# Allegro board Multiuart_power2_V1_0.brd
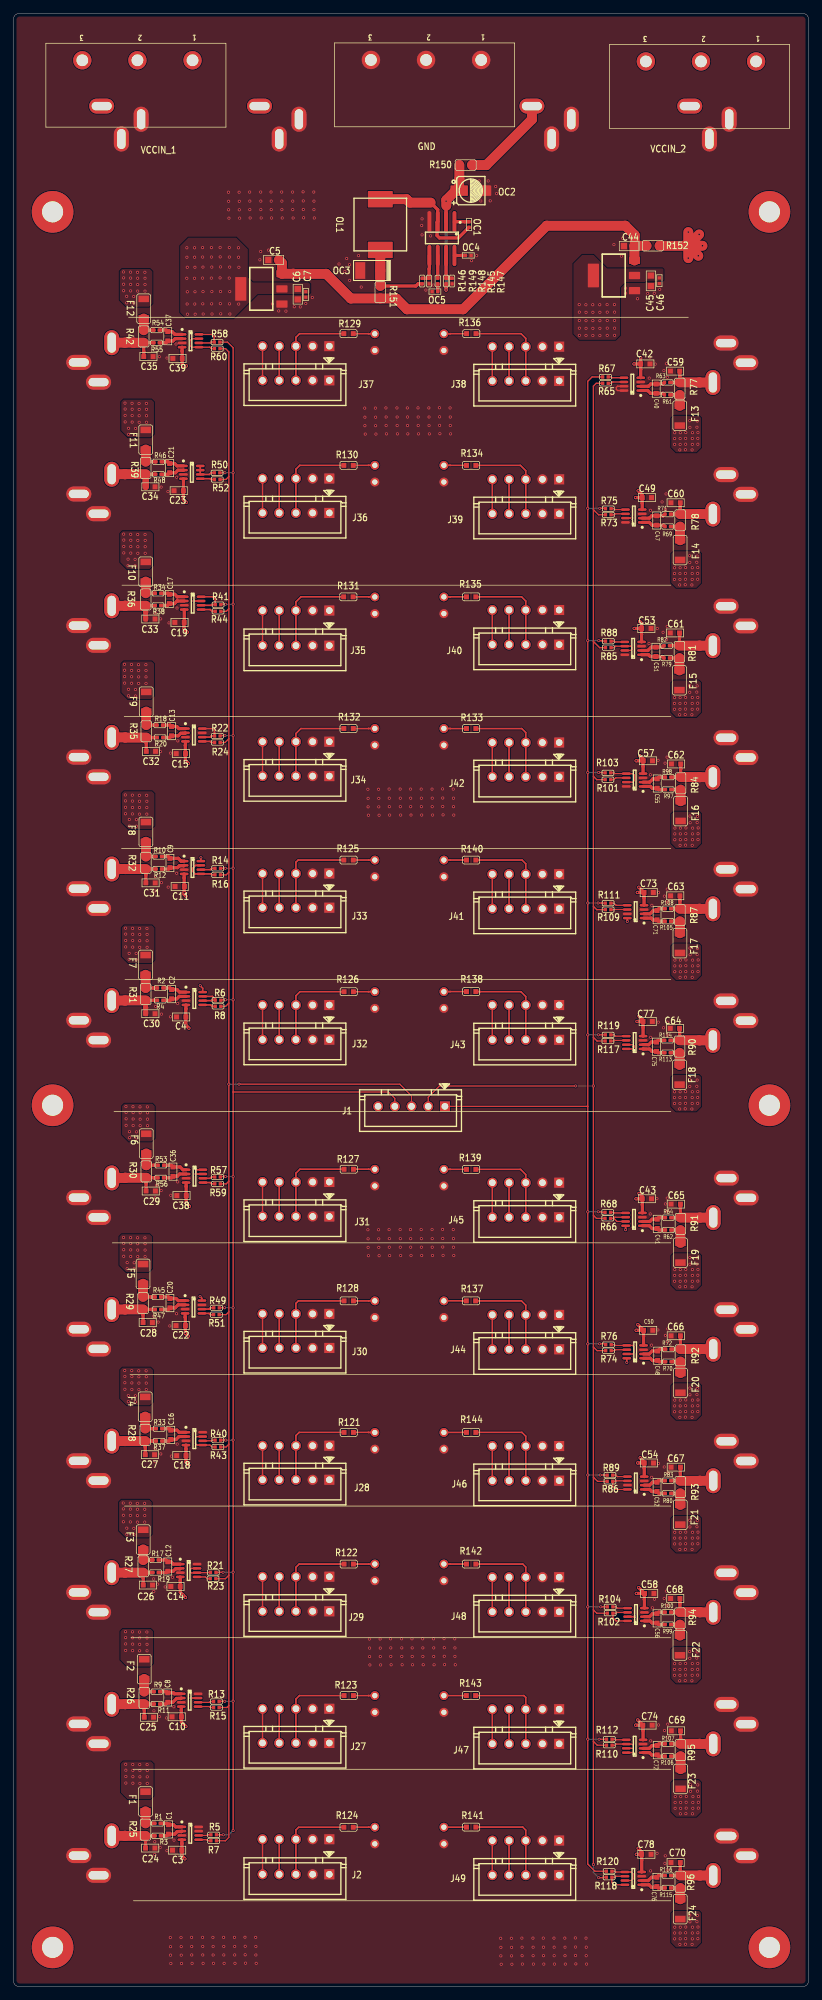
[diagram p0: board, top side]
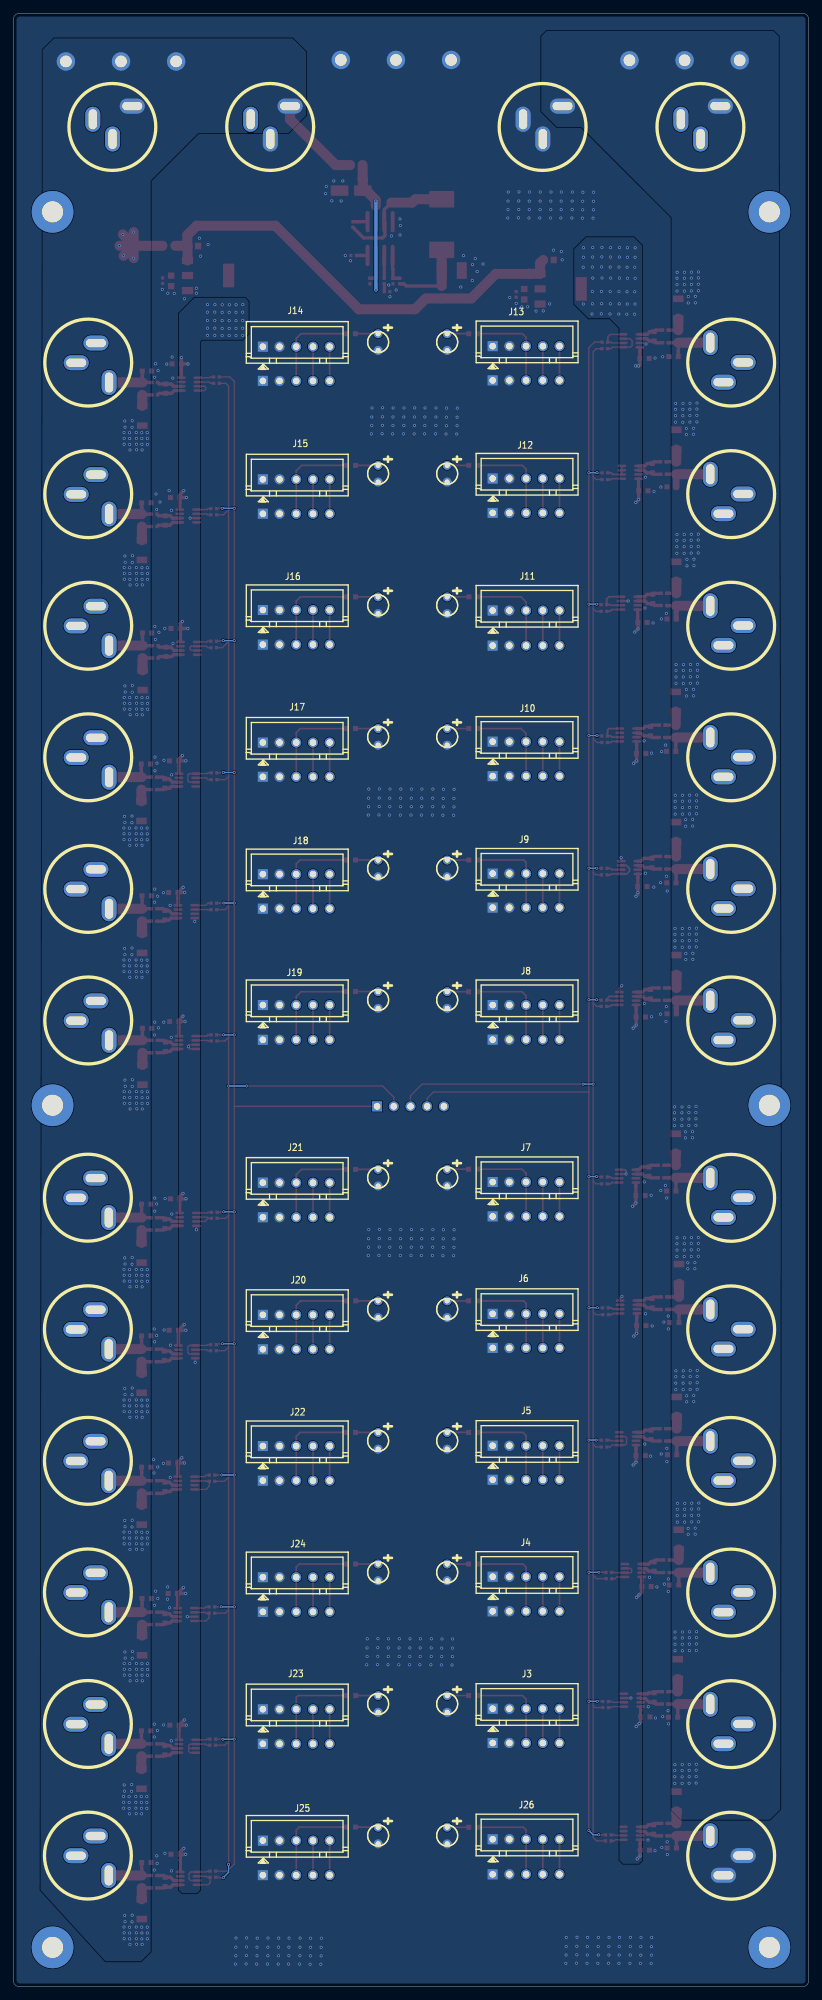
[diagram p1: board, bottom side, seen from below]

Outline 121 x 300 mm; copper layers: TOP, BOTTOM. Coordinates in mm from the lower left corner of the outline.
Outline path: 0,298.98 arc(0.3,299.7) 1.02,300 119.98,300 arc(120.7,299.7) 121,298.98 121,1.02 arc(120.7,0.3) 119.98,0 1.02,0 arc(0.3,0.3) 0,1.02 0,298.98

## Placement (name value [footprint] x y rotation side)
C1  1uF  [C0603]  23.61 23.93 90 top
C2  1uF  [C0603]  24.1 150.89 90 top
C3  1uF  [C0603]  24.94 20.78 180 top
C4  1uF  [C0603]  25.55 147.42 180 top
C5  10uF  [CC0603]  39.6 262.48 0 top
C6  10uF  [CC0603]  43.28 257.28 90 top
C7  104  [C0402]  44.5 257.25 270 top
C8  1uF  [C0603]  23.51 43.98 90 top
C9  1uF  [C0603]  23.84 170.83 90 top
C10  1uF  [C0603]  24.87 41.05 180 top
C11  1uF  [C0603]  25.32 167.26 180 top
C12  1uF  [C0603]  23.51 63.89 90 top
C13  1uF  [C0603]  24.07 190.87 90 top
C14  1uF  [C0603]  24.69 60.86 180 top
C15  1uF  [C0603]  25.5 187.45 180 top
C16  1uF  [C0603]  23.97 83.91 90 top
C17  1uF  [C0603]  23.74 210.96 90 top
C18  1uF  [C0603]  25.58 80.75 180 top
C19  1uF  [C0603]  25.3 207.39 180 top
C20  1uF  [C0603]  23.84 103.92 90 top
C21  1uF  [C0603]  23.79 230.85 90 top
C22  1uF  [C0603]  25.48 100.51 180 top
C23  1uF  [C0603]  25.17 227.41 180 top
C24  10uF  [C0603]  20.85 21.09 0 top
C25  10uF  [C0603]  20.64 40.98 0 top
C26  10uF  [C0603]  20.49 61.07 0 top
C27  10uF  [C0603]  20.8 80.88 180 top
C28  10uF  [C0603]  20.46 100.98 180 top
C29  10uF  [C0603]  20.92 120.97 180 top
C30  10uF  [C0603]  20.87 147.91 180 top
C31  10uF  [C0603]  20.9 167.8 180 top
C32  10uF  [C0603]  20.95 187.79 180 top
C33  10uF  [C0603]  20.87 207.91 180 top
C34  10uF  [C0603]  20.87 228 180 top
C35  10uF  [C0603]  20.57 247.8 180 top
C36  1uF  [C0603]  24.3 123.91 90 top
C37  1uF  [C0603]  23.51 250.89 90 top
C38  1uF  [C0603]  25.6 120.27 180 top
C39  1uF  [C0603]  24.99 247.52 180 top
C40  1uF  [C0603]  97.79 242.93 270 top
C41  1uF  [C0603]  97.94 115.98 270 top
C42  1uF  [C0603]  96.14 246.68 0 top
C43  1uF  [C0603]  96.37 119.79 0 top
C44  10uF  [CC0603]  93.68 264.59 0 top
C45  10uF  [CC0603]  96.98 259.31 90 top
C46  104  [C0402]  98.27 259.33 270 top
C47  1uF  [C0603]  97.87 222.88 270 top
C48  1uF  [C0603]  98.02 95.94 270 top
C49  1uF  [C0603]  96.37 226.36 0 top
C50  1uF  [C0603]  96.57 99.8 0 top
C51  1uF  [C0603]  97.74 202.92 270 top
C52  1uF  [C0603]  97.92 76 270 top
C53  1uF  [C0603]  96.29 206.48 0 top
C54  1uF  [C0603]  96.67 79.63 0 top
C55  1uF  [C0603]  97.94 182.91 270 top
C56  1uF  [C0603]  97.92 56.01 270 top
C57  1uF  [C0603]  96.52 186.36 0 top
C58  1uF  [C0603]  96.72 59.79 0 top
C59  10uF  [C0603]  100.66 245.59 0 top
C60  10uF  [C0603]  100.74 225.58 0 top
C61  10uF  [C0603]  100.63 205.79 0 top
C62  10uF  [C0603]  100.81 185.88 0 top
C63  10uF  [C0603]  100.69 165.84 0 top
C64  10uF  [C0603]  100.63 145.69 0 top
C65  10uF  [C0603]  100.76 118.97 0 top
C66  10uF  [C0603]  100.76 98.96 0 top
C67  10uF  [C0603]  100.76 78.99 0 top
C68  10uF  [C0603]  100.69 59.03 0 top
C69  10uF  [C0603]  100.79 38.91 0 top
C70  10uF  [C0603]  100.74 18.9 0 top
C71  1uF  [C0603]  97.92 162.89 270 top
C72  1uF  [C0603]  97.94 35.97 270 top
C73  1uF  [C0603]  96.65 166.34 0 top
C74  1uF  [C0603]  96.47 39.78 0 top
C75  1uF  [C0603]  97.84 142.9 270 top
C76  1uF  [C0603]  97.89 15.95 270 top
C77  1uF  [C0603]  96.49 146.74 0 top
C78  1uF  [C0603]  96.29 20.14 0 top
D13  LED  [LED_S]  55 83 270 bottom
D14  LED  [LED_S]  55 63 270 bottom
D15  LED  [LED_S]  55 43 270 bottom
D16  LED  [LED_S]  55 23 270 bottom
D17  LED  [LED_S]  55 170 270 bottom
D18  LED  [LED_S]  55 150 270 bottom
D19  LED  [LED_S]  55 123 270 bottom
D20  LED  [LED_S]  55 103 270 bottom
D21  LED  [LED_S]  55 250 270 bottom
D22  LED  [LED_S]  55 230 270 bottom
D23  LED  [LED_S]  55 210 270 bottom
D24  LED  [LED_S]  55 190 270 bottom
D25  LED  [LED_S]  65.5 190 270 bottom
D26  LED  [LED_S]  65.5 210 270 bottom
D27  LED  [LED_S]  65.5 230 270 bottom
D28  LED  [LED_S]  65.5 250 270 bottom
D29  LED  [LED_S]  65.5 103 270 bottom
D30  LED  [LED_S]  65.5 123 270 bottom
D31  LED  [LED_S]  65.5 150 270 bottom
D32  LED  [LED_S]  65.5 170 270 bottom
D33  LED  [LED_S]  65.5 23 270 bottom
D34  LED  [LED_S]  65.5 43 270 bottom
D35  LED  [LED_S]  65.5 63 270 bottom
D36  LED  [LED_S]  65.5 83 270 bottom
F1  3A  [R1206]  20.13 28.17 270 top
F2  3A  [R1206]  19.93 48.3 270 top
F3  3A  [R1206]  19.78 67.98 270 top
F4  3A  [R1206]  20.08 88.17 270 top
F5  3A  [R1206]  19.75 108.37 270 top
F6  3A  [R1206]  20.24 128.17 270 top
F7  3A  [R1206]  20.13 155.33 270 top
F8  3A  [R1206]  20.19 175.55 270 top
F9  3A  [R1206]  20.24 195.34 270 top
F10  3A  [R1206]  20.16 215.1 270 top
F11  3A  [R1206]  20.16 235.16 270 top
F12  3A  [R1206]  19.86 255.08 270 top
F13  3A  [R1206]  101.37 238.81 90 top
F14  3A  [R1206]  101.42 218.39 90 top
F15  3A  [R1206]  101.32 198.6 90 top
F16  3A  [R1206]  101.5 178.71 90 top
F17  3A  [R1206]  101.4 158.65 90 top
F18  3A  [R1206]  101.35 138.63 90 top
F19  3A  [R1206]  101.47 111.58 90 top
F20  3A  [R1206]  101.47 91.8 90 top
F21  3A  [R1206]  101.45 71.75 90 top
F22  3A  [R1206]  101.4 51.89 90 top
F23  3A  [R1206]  101.5 31.6 90 top
F24  3A  [R1206]  101.45 11.81 90 top
J1  -  [CON5]  55.5 133.83 0 top
J2  -  [CON5]  37.92 17.1 0 top
J3  -  [CON5]  37.92 42.27 0 bottom
J4  -  [CON5]  37.92 62.34 0 bottom
J5  -  [CON5]  37.92 82.25 0 bottom
J6  -  [CON5]  37.92 102.29 0 bottom
J7  -  [CON5]  37.92 122.33 0 bottom
J8  -  [CON5]  37.92 149.23 0 bottom
J9  -  [CON5]  37.92 169.22 0 bottom
J10  -  [CON5]  37.92 189.26 0 bottom
J11  -  [CON5]  37.92 209.2 0 bottom
J12  -  [CON5]  37.92 229.27 0 bottom
J13  -  [CON5]  37.92 249.38 0 bottom
J14  -  [CON5]  72.87 249.31 0 bottom
J15  -  [CON5]  72.87 229.14 0 bottom
J16  -  [CON5]  72.87 209.28 0 bottom
J17  -  [CON5]  72.87 189.14 0 bottom
J18  -  [CON5]  72.87 169.12 0 bottom
J19  -  [CON5]  72.87 149.23 0 bottom
J20  -  [CON5]  72.87 102.14 0 bottom
J21  -  [CON5]  72.87 122.23 0 bottom
J22  -  [CON5]  72.87 82.2 0 bottom
J23  -  [CON5]  72.87 42.2 0 bottom
J24  -  [CON5]  72.87 62.26 0 bottom
J25  -  [CON5]  72.87 22.23 0 bottom
J26  -  [CON5]  37.92 22.44 0 bottom
J27  -  [CON5]  37.92 37.07 0 top
J28  -  [CON5]  37.92 77.07 0 top
J29  -  [CON5]  37.92 57.08 0 top
J30  -  [CON5]  37.92 97.11 0 top
J31  -  [CON5]  37.92 117.1 0 top
J32  -  [CON5]  37.92 143.97 0 top
J33  -  [CON5]  37.92 164.04 0 top
J34  -  [CON5]  37.92 184.03 0 top
J35  -  [CON5]  37.92 203.87 0 top
J36  -  [CON5]  37.92 224.04 0 top
J37  -  [CON5]  37.92 244.18 0 top
J38  -  [CON5]  72.87 244.1 0 top
J39  -  [CON5]  72.87 223.91 0 top
J40  -  [CON5]  72.87 204.02 0 top
J41  -  [CON5]  72.87 163.89 0 top
J42  -  [CON5]  72.87 183.93 0 top
J43  -  [CON5]  72.87 143.95 0 top
J44  -  [CON5]  72.87 96.91 0 top
J45  -  [CON5]  72.87 116.97 0 top
J46  -  [CON5]  72.87 76.94 0 top
J47  -  [CON5]  72.87 36.94 0 top
J48  -  [CON5]  72.87 57 0 top
J49  -  [CON5]  72.87 16.97 0 top
NOREF  -  [unnamed]  6 134 0 top
NOREF#2  -  [unnamed]  115.01 6 0 top
NOREF#3  -  [unnamed]  115.01 269.8 0 top
NOREF#4  -  [unnamed]  115.01 134 0 top
NOREF#5  -  [unnamed]  6 269.8 0 top
NOREF#6  -  [unnamed]  6 6 0 top
OC1  10nF  [C0402]  69.32 267.87 270 top
OC2  22uF-25V  [CAPAE430X600]  69.6 273.02 0 top
OC3  22uF-16V  [CT1210]  54.31 260.88 180 top
OC4  104  [C0402]  69.22 263.17 0 top
OC5  332  [C0402]  64.14 257.68 180 top
OL1  22uH-DCR<0.1R-2A  [INDP8X8]  55.83 267.87 270 top
P1  ACIN  [DC_3]  8.71 19.96 180 bottom
P2  ACIN  [DC_3]  8.71 39.96 180 bottom
P3  ACIN  [DC_3]  8.71 59.96 180 bottom
P4  ACIN  [DC_3]  8.71 79.96 180 bottom
P5  ACIN  [DC_3]  8.71 99.96 180 bottom
P6  ACIN  [DC_3]  8.71 119.96 180 bottom
P7  ACIN  [DC_3]  8.71 146.92 180 bottom
P8  ACIN  [DC_3]  8.71 166.92 180 bottom
P9  ACIN  [DC_3]  8.71 186.92 180 bottom
P10  ACIN  [DC_3]  8.71 206.92 180 bottom
P11  ACIN  [DC_3]  8.71 226.92 180 bottom
P12  ACIN  [DC_3]  8.71 246.92 180 bottom
P13  ACIN  [DC_3]  16.46 279.61 270 bottom
P14  ACIN  [DC_3]  40.46 279.61 270 bottom
P15  ACIN  [DC_3]  112.68 246.86 0 bottom
P16  ACIN  [DC_3]  112.68 226.86 0 bottom
P17  ACIN  [DC_3]  112.68 206.86 0 bottom
P18  ACIN  [DC_3]  112.68 186.86 0 bottom
P19  ACIN  [DC_3]  112.68 166.86 0 bottom
P20  ACIN  [DC_3]  112.68 146.86 0 bottom
P21  ACIN  [DC_3]  112.73 119.93 0 bottom
P22  ACIN  [DC_3]  112.73 99.93 0 bottom
P23  ACIN  [DC_3]  112.73 79.93 0 bottom
P24  ACIN  [DC_3]  112.73 59.93 0 bottom
P25  ACIN  [DC_3]  112.73 39.93 0 bottom
P26  ACIN  [DC_3]  112.73 19.93 0 bottom
P27  ACIN  [DC_3]  105.89 279.61 270 bottom
P28  ACIN  [DC_3]  81.89 279.61 270 bottom
R1  10R  [R0402]  21.96 24.84 0 top
R2  10R  [R0402]  22.37 151.83 0 top
R3  10R  [R0402]  21.98 22.96 0 top
R4  10R  [R0402]  22.37 149.95 0 top
R5  0R  [R0402]  30.49 23.11 0 top
R6  0R  [R0402]  31.16 149.97 0 top
R7  0R  [R0402]  30.49 22.2 0 top
R8  0R  [R0402]  31.16 149.03 0 top
R9  10R  [R0402]  21.86 44.87 0 top
R10  10R  [R0402]  22.14 171.82 0 top
R11  10R  [R0402]  21.86 42.99 0 top
R12  10R  [R0402]  22.14 169.91 0 top
R13  0R  [R0402]  30.9 43.37 0 top
R14  0R  [R0402]  31.11 170.01 0 top
R15  0R  [R0402]  30.9 42.45 0 top
R16  0R  [R0402]  31.11 169.02 0 top
R17  10R  [R0402]  21.66 64.88 0 top
R18  10R  [R0402]  22.29 191.78 0 top
R19  10R  [R0402]  21.66 62.98 0 top
R20  10R  [R0402]  22.34 189.9 0 top
R21  0R  [R0402]  30.43 62.99 0 top
R22  0R  [R0402]  31.06 190.13 0 top
R23  0R  [R0402]  30.4 62.04 0 top
R24  0R  [R0402]  31.06 189.14 0 top
R25  0R01  [R0805]  20.13 23.9 270 top
R26  0R01  [R0805]  19.93 43.93 270 top
R27  0R01  [R0805]  19.78 63.92 270 top
R28  0R01  [R0805]  20.08 83.91 270 top
R29  0R01  [R0805]  19.75 103.92 270 top
R30  0R01  [R0805]  20.24 123.94 270 top
R31  0R01  [R0805]  20.16 150.89 270 top
R32  0R01  [R0805]  20.19 170.85 270 top
R33  10R  [R0402]  22.19 84.85 0 top
R34  10R  [R0402]  22.04 211.82 0 top
R35  0R01  [R0805]  20.24 190.84 270 top
R36  0R01  [R0805]  20.16 210.88 270 top
R37  10R  [R0402]  22.19 82.97 0 top
R38  10R  [R0402]  22.04 209.97 0 top
R39  0R01  [R0805]  20.16 230.87 270 top
R40  0R  [R0402]  31.13 83.09 0 top
R41  0R  [R0402]  31.16 210.09 0 top
R42  0R01  [R0805]  19.86 250.86 270 top
R43  0R  [R0402]  31.13 82.05 0 top
R44  0R  [R0402]  31.16 209.08 0 top
R45  10R  [R0402]  22.01 104.86 0 top
R46  10R  [R0402]  22.12 231.81 0 top
R47  10R  [R0402]  22.04 102.96 0 top
R48  10R  [R0402]  22.09 229.91 0 top
R49  0R  [R0402]  30.93 103.21 0 top
R50  0R  [R0402]  31.01 230.13 0 top
R51  0R  [R0402]  30.9 102.17 0 top
R52  0R  [R0402]  31.03 229.12 0 top
R53  10R  [R0402]  22.47 124.88 0 top
R54  10R  [R0402]  21.81 251.83 0 top
R55  10R  [R0402]  21.81 249.9 0 top
R56  10R  [R0402]  22.45 122.97 0 top
R57  0R  [R0402]  31.08 123.1 0 top
R58  0R  [R0402]  31.01 250 0 top
R59  0R  [R0402]  31.08 122.06 0 top
R60  0R  [R0402]  31.03 249.01 0 top
R61  10R  [R0402]  99.47 241.99 180 top
R62  10R  [R0402]  99.62 115.04 180 top
R63  10R  [R0402]  99.47 243.87 180 top
R64  10R  [R0402]  99.62 116.92 180 top
R65  0R  [R0402]  90.07 243.74 180 top
R66  0R  [R0402]  90.42 116.81 180 top
R67  0R  [R0402]  90.07 244.7 180 top
R68  0R  [R0402]  90.42 117.73 180 top
R69  10R  [R0402]  99.54 221.97 180 top
R70  10R  [R0402]  99.64 95.02 180 top
R71  10R  [R0402]  99.54 223.85 180 top
R72  10R  [R0402]  99.64 96.93 180 top
R73  0R  [R0402]  90.5 223.75 180 top
R74  0R  [R0402]  90.53 96.7 180 top
R75  0R  [R0402]  90.5 224.69 180 top
R76  0R  [R0402]  90.53 97.61 180 top
R77  0R01  [R0805]  101.37 242.93 90 top
R78  0R01  [R0805]  101.42 222.91 90 top
R79  10R  [R0402]  99.39 201.98 180 top
R80  10R  [R0402]  99.59 75.01 180 top
R81  0R01  [R0805]  101.32 202.92 90 top
R82  10R  [R0402]  99.39 203.86 180 top
R83  10R  [R0402]  99.59 76.94 180 top
R84  0R01  [R0805]  101.5 182.93 90 top
R85  0R  [R0402]  90.5 203.56 180 top
R86  0R  [R0402]  90.75 76.83 180 top
R87  0R01  [R0805]  101.4 162.92 90 top
R88  0R  [R0402]  90.5 204.55 180 top
R89  0R  [R0402]  90.75 77.77 180 top
R90  0R01  [R0805]  101.35 142.93 90 top
R91  0R01  [R0805]  101.47 115.98 90 top
R92  0R01  [R0805]  101.47 95.99 90 top
R93  0R01  [R0805]  101.45 75.97 90 top
R94  0R01  [R0805]  101.4 56.01 90 top
R95  0R01  [R0805]  101.47 35.99 90 top
R96  0R01  [R0805]  101.45 15.98 90 top
R97  10R  [R0402]  99.62 181.99 180 top
R98  10R  [R0402]  99.62 183.87 180 top
R99  10R  [R0402]  99.57 55.07 180 top
R100  10R  [R0402]  99.57 56.95 180 top
R101  0R  [R0402]  90.45 183.49 180 top
R102  0R  [R0402]  90.78 56.79 180 top
R103  0R  [R0402]  90.45 184.53 180 top
R104  0R  [R0402]  90.78 57.76 180 top
R105  10R  [R0402]  99.57 161.98 180 top
R106  10R  [R0402]  99.59 35.05 180 top
R107  10R  [R0402]  99.59 36.93 180 top
R108  10R  [R0402]  99.57 163.88 180 top
R109  0R  [R0402]  90.47 163.73 180 top
R110  0R  [R0402]  90.65 36.73 180 top
R111  0R  [R0402]  90.47 164.72 180 top
R112  0R  [R0402]  90.65 37.64 180 top
R113  10R  [R0402]  99.52 141.99 180 top
R114  10R  [R0402]  99.49 143.87 180 top
R115  10R  [R0402]  99.57 15.04 180 top
R116  10R  [R0402]  99.57 16.92 180 top
R117  0R  [R0402]  90.45 143.76 180 top
R118  0R  [R0402]  90.63 16.66 180 top
R119  0R  [R0402]  90.47 144.7 180 top
R120  0R  [R0402]  90.63 17.58 180 top
R121  102  [R0603]  51.03 84.28 0 top
R122  102  [R0603]  51.03 64.26 0 top
R123  102  [R0603]  51.03 44.27 0 top
R124  102  [R0603]  51 24.26 0 top
R125  102  [R0603]  51 171.27 0 top
R126  102  [R0603]  51.03 151.26 0 top
R127  102  [R0603]  51.03 124.28 0 top
R128  102  [R0603]  51.03 104.27 0 top
R129  102  [R0603]  51 251.28 0 top
R130  102  [R0603]  51 231.27 0 top
R131  102  [R0603]  50.98 211.28 0 top
R132  102  [R0603]  51 191.26 0 top
R133  102  [R0603]  69.65 191.26 180 top
R134  102  [R0603]  69.65 231.27 180 top
R135  102  [R0603]  69.65 211.28 180 top
R136  102  [R0603]  69.67 251.28 180 top
R137  102  [R0603]  69.62 104.27 180 top
R138  102  [R0603]  69.65 151.28 180 top
R139  102  [R0603]  69.65 124.26 180 top
R140  102  [R0603]  69.65 171.27 180 top
R141  102  [R0603]  69.65 24.28 180 top
R142  102  [R0603]  69.65 64.26 180 top
R143  102  [R0603]  69.62 44.27 180 top
R144  102  [R0603]  69.65 84.28 180 top
R145  1M  [R0402]  65.84 259.28 90 top
R146  47K  [R0402]  62.2 259.28 270 top
R147  1M  [R0402]  66.75 259.28 90 top
R148  2K2  [R0402]  64.57 259.28 90 top
R149  10K  [R0402]  63.25 259.28 90 top
R150  0R  [R0805]  68.81 276.91 180 top
R151  0R  [R0805]  55.83 257.58 270 top
R152  0R/NC  [R0805]  97.28 264.64 180 top
U1  INA219BIDCNT  [SOP8P0_65B1_65X3_00H1_45]  26.93 23.34 270 top
U2  INA219BIDCNT  [SOP8P0_65B1_65X3_00H1_45]  27.55 150.23 270 top
U3  AMS1117-3.3V  [SOT223]  37.72 258.09 90 top
U4  INA219BIDCNT  [SOP8P0_65B1_65X3_00H1_45]  26.84 43.57 270 top
U5  INA219BIDCNT  [SOP8P0_65B1_65X3_00H1_45]  27.27 170.14 270 top
U6  INA219BIDCNT  [SOP8P0_65B1_65X3_00H1_45]  26.69 63.28 270 top
U7  INA219BIDCNT  [SOP8P0_65B1_65X3_00H1_45]  27.48 190.28 270 top
U8  INA219BIDCNT  [SOP8P0_65B1_65X3_00H1_45]  27.3 210.32 270 top
U9  INA219BIDCNT  [SOP8P0_65B1_65X3_00H1_45]  27.55 83.32 270 top
U10  INA219BIDCNT  [SOP8P0_65B1_65X3_00H1_45]  27.42 103.34 270 top
U11  INA219BIDCNT  [SOP8P0_65B1_65X3_00H1_45]  27.17 230.21 270 top
U12  INA219BIDCNT  [SOP8P0_65B1_65X3_00H1_45]  27.58 123.23 270 top
U13  INA219BIDCNT  [SOP8P0_65B1_65X3_00H1_45]  26.97 250.2 270 top
U14  INA219BIDCNT  [SOP8P0_65B1_65X3_00H1_45]  94.16 243.61 90 top
U15  INA219BIDCNT  [SOP8P0_65B1_65X3_00H1_45]  94.41 116.66 90 top
U16  AMS1117-3.3V  [SOT223]  91.34 260.12 90 top
U17  INA219BIDCNT  [SOP8P0_65B1_65X3_00H1_45]  94.39 223.57 90 top
U18  INA219BIDCNT  [SOP8P0_65B1_65X3_00H1_45]  94.59 96.52 90 top
U19  INA219BIDCNT  [SOP8P0_65B1_65X3_00H1_45]  94.28 203.45 90 top
U20  INA219BIDCNT  [SOP8P0_65B1_65X3_00H1_45]  94.69 76.58 90 top
U21  INA219BIDCNT  [SOP8P0_65B1_65X3_00H1_45]  94.51 183.44 90 top
U22  INA219BIDCNT  [SOP8P0_65B1_65X3_00H1_45]  94.72 56.59 90 top
U23  INA219BIDCNT  [SOP8P0_65B1_65X3_00H1_45]  94.67 163.42 90 top
U24  INA219BIDCNT  [SOP8P0_65B1_65X3_00H1_45]  94.51 36.58 90 top
U25  INA219BIDCNT  [SOP8P0_65B1_65X3_00H1_45]  94.51 143.54 90 top
U26  INA219BIDCNT  [SOP8P0_65B1_65X3_00H1_45]  94.31 16.48 90 top
U27  MP1482DS  [SO8N]  65.2 265.84 180 top
UP1  CON3  [CON3-P]  18.92 288.49 180 top
UP2  CON3  [CON3-P]  62.81 288.54 180 top
UP3  CON3  [CON3-P]  104.62 288.32 180 top

## Library data of the parts
C1-C4 C8-C23 C36-C43 C47-C58 C71-C78 = CAPACITOR_0: room: site1
C5-C7 C44-C46 OC1 OC4 OC5 = CAPACITOR
C24-C35 C59-C70 = C-C0603
D13-D36 = LED: Tolerance: RichardLC
F1-F24 = L-LP2_00X1_60H1_00
J1-J49 = CON5
OC2 = CAPACITOR_POL_0: Tolerance: RichardLC
OC3 = CAPACITOR_POL_0
OL1 = INDUCTOR_1: Tolerance: RichardLC
P1-P28 = BNC-2
R1-R4 R9-R12 R17-R20 R33 R34 R37 R38 R45-R48 R53-R56 R61-R64 R69-R72 R79 R80 R82 R83 R97-R100 R105-R108 R113-R116 = R: room: site1
R5-R8 R13-R16 R21-R24 R40 R41 R43 R44 R49-R52 R57-R60 R65-R68 R73-R76 R85 R86 R88 R89 R101-R104 R109-R112 R117-R144 = R1_0805
R25-R32 R35 R36 R39 R42 R77 R78 R81 R84 R87 R90-R96 R150-R152 = R-R0805
R145-R149 = R
U1 U2 U4-U15 U17-U26 = RT9266PE_0: Tolerance: RichardLC; User Part Number: pn; room: site1
U3 U16 = AMS1117: User Part Number: pn; Tolerance: RichardLC
U27 = PM1066: User Part Number: pn; Tolerance: RichardLC
UP1-UP3 = CON3: room: CPU

## Footprints (pads in the part's own frame, mm; a bottom-side part is the same pattern mirrored in y, then rotated)
C0402
  rect 0.5x0.5 smd: 1(0.425,0) 2(-0.425,0)
C0603
  rect 0.76x0.76 smd: 1(-0.71,0) 2(0.71,0)
CAPAE430X600
  custom 2.66x1.6 smd: 1(-1.77,0) 2(1.77,0)
CC0603
  rect 0.95x1 smd: 1(-0.8,0) 2(0.8,0)
CON3-P
  round 2.794 hole 1.778: 1(-8.357,-4.343) 2(0.025,-4.343) 3(8.407,-4.343)
CON5
  rect 1.524x1.524 hole 1.016: 1(10.16,0)
  round 1.524 hole 1.016: 2(7.62,0) 3(5.08,0) 4(2.54,0) 5(0,0)
CT1210
  rect 1.524x2.54 smd: 1(-1.524,0) 2(1.524,0)
DC_3
  oval 2.286x3.81 hole 1.27x3.048: 1(-6.27,3)
  oval 3.81x2.286 hole 3.048x1.27: 2(-1.27,0) 3(-4.27,-3)
INDP8X8
  custom 2.5x3.8 smd: 1(-3.85,0) 2(3.85,0)
LED_S
  round 1.35 hole 0.8: 1(-1.27,0) 2(1.27,0)
R0402
  rect 0.5x0.5 smd: 1(0.425,0) 2(-0.425,0)
R0603
  rect 0.76x0.76 smd: 1(-0.71,0) 2(0.71,0)
R0805
  rect 0.9x1.3 smd: 1(-0.95,0) 2(0.95,0)
R1206
  rect 1x1.6 smd: 1(-1.5,0) 2(1.5,0)
SO8N
  oval 0.61x3.251 smd: 1(-1.905,-2.465) 2(-0.635,-2.465) 3(0.635,-2.465) 4(1.905,-2.465) 5(1.905,2.665) 6(0.635,2.665) 7(-0.635,2.665) 8(-1.905,2.665)
SOP8P0_65B1_65X3_00H1_45
  oval 0.399x1.351 smd: 1(-0.975,-1.275) 2(-0.325,-1.275) 3(0.325,-1.275) 4(0.975,-1.275) 5(0.975,1.275) 6(0.325,1.275) 7(-0.325,1.275) 8(-0.975,1.275)
SOT223
  custom 1.1x1.7 smd: 1(-2.3,-3.15) 2(0,-3.15) 3(2.3,-3.15)
  custom 3.6x1.7 smd: 4(0,3.1)
unnamed
  round 6.35 hole 3.2: (0,0)

## Nets
GND: C3.2 C4.2 C5.1 C6.1 C7.1 C10.2 C11.2 C14.2 C15.2 C18.2 C19.2 C22.2 C23.2 C24.2 C25.2 C26.2 C27.1 C28.1 C29.1 C30.1 C31.1 C32.1 C33.1 C34.1 C35.1 C38.2 C39.2 C42.2 C43.2 C44.1 C45.1 C46.1 C49.2 C50.2 C53.2 C54.2 C57.2 C58.2 C59.1 C60.1 C61.1 C62.1 C63.1 C64.1 C65.1 C66.1 C67.1 C68.1 C69.1 C70.1 C73.2 C74.2 C77.2 C78.2 D13.2(CATHODE) D14.2(CATHODE) D15.2(CATHODE) D16.2(CATHODE) D17.2(CATHODE) D18.2(CATHODE) D19.2(CATHODE) D20.2(CATHODE) D21.2(CATHODE) D22.2(CATHODE) D23.2(CATHODE) D24.2(CATHODE) D25.2(CATHODE) D26.2(CATHODE) D27.2(CATHODE) D28.2(CATHODE) D29.2(CATHODE) D30.2(CATHODE) D31.2(CATHODE) D32.2(CATHODE) D33.2(CATHODE) D34.2(CATHODE) D35.2(CATHODE) D36.2(CATHODE) J2.1 J2.2 J3.1 J3.2 J4.1 J4.2 J5.1 J5.2 J6.1 J6.2 J7.1 J7.2 J8.1 J8.2 J9.1 J9.2 J10.1 J10.2 J11.1 J11.2 J12.1 J12.2 J13.1 J13.2 J14.1 J14.2 J15.1 J15.2 J16.1 J16.2 J17.1 J17.2 J18.1 J18.2 J19.1 J19.2 J20.1 J20.2 J21.1 J21.2 J22.1 J22.2 J23.1 J23.2 J24.1 J24.2 J25.1 J25.2 J26.1 J26.2 J27.1 J27.2 J28.1 J28.2 J29.1 J29.2 J30.1 J30.2 J31.1 J31.2 J32.1 J32.2 J33.1 J33.2 J34.1 J34.2 J35.1 J35.2 J36.1 J36.2 J37.1 J37.2 J38.1 J38.2 J39.1 J39.2 J40.1 J40.2 J41.1 J41.2 J42.1 J42.2 J43.1 J43.2 J44.1 J44.2 J45.1 J45.2 J46.1 J46.2 J47.1 J47.2 J48.1 J48.2 J49.1 J49.2 OC2.2 OC3.2 OC4.1 OC5.1 P1.2(CENTER2) P1.3(SHIELD) P2.2(CENTER2) P2.3(SHIELD) P3.2(CENTER2) P3.3(SHIELD) P4.2(CENTER2) P4.3(SHIELD) P5.2(CENTER2) P5.3(SHIELD) P6.2(CENTER2) P6.3(SHIELD) P7.2(CENTER2) P7.3(SHIELD) P8.2(CENTER2) P8.3(SHIELD) P9.2(CENTER2) P9.3(SHIELD) P10.2(CENTER2) P10.3(SHIELD) P11.2(CENTER2) P11.3(SHIELD) P12.2(CENTER2) P12.3(SHIELD) P13.2(CENTER2) P13.3(SHIELD) P14.2(CENTER2) P14.3(SHIELD) P15.2(CENTER2) P15.3(SHIELD) P16.2(CENTER2) P16.3(SHIELD) P17.2(CENTER2) P17.3(SHIELD) P18.2(CENTER2) P18.3(SHIELD) P19.2(CENTER2) P19.3(SHIELD) P20.2(CENTER2) P20.3(SHIELD) P21.2(CENTER2) P21.3(SHIELD) P22.2(CENTER2) P22.3(SHIELD) P23.2(CENTER2) P23.3(SHIELD) P24.2(CENTER2) P24.3(SHIELD) P25.2(CENTER2) P25.3(SHIELD) P26.2(CENTER2) P26.3(SHIELD) P27.2(CENTER2) P27.3(SHIELD) P28.2(CENTER2) P28.3(SHIELD) R147.2 R149.2 U1.3(GND) U1.7(A0) U1.8(A1) U2.3(GND) U3.1(ADJUST) U4.3(GND) U4.8(A1) U5.3(GND) U6.3(GND) U6.8(A1) U7.3(GND) U7.7(A0) U8.3(GND) U9.3(GND) U9.8(A1) U10.3(GND) U10.7(A0) U11.3(GND) U12.3(GND) U13.3(GND) U14.3(GND) U14.7(A0) U14.8(A1) U15.3(GND) U16.1(ADJUST) U17.3(GND) U17.8(A1) U18.3(GND) U19.3(GND) U19.8(A1) U20.3(GND) U20.7(A0) U21.3(GND) U21.8(A1) U22.3(GND) U23.3(GND) U23.7(A0) U24.3(GND) U25.3(GND) U26.3(GND) U27.4(GND) UP2.1 UP2.2 UP2.3
VCC_3V3_0: C3.1 C4.1 C6.2 C7.2 C10.1 C11.1 C14.1 C15.1 C18.1 C19.1 C22.1 C23.1 C38.1 C39.1 U1.4(VS) U2.4(VS) U2.8(A1) U3.2(OUT) U3.4(NC) U4.4(VS) U4.7(A0) U5.4(VS) U5.8(A1) U6.4(VS) U7.4(VS) U8.4(VS) U8.7(A0) U9.4(VS) U10.4(VS) U10.8(A1) U11.4(VS) U12.4(VS) U12.7(A0) U12.8(A1) U13.4(VS)
VCC_3V3_1: C42.1 C43.1 C45.2 C46.2 C49.1 C50.1 C53.1 C54.1 C57.1 C58.1 C73.1 C74.1 C77.1 C78.1 U14.4(VS) U15.4(VS) U15.8(A1) U16.2(OUT) U16.4(NC) U17.4(VS) U17.7(A0) U18.4(VS) U18.8(A1) U19.4(VS) U20.4(VS) U21.4(VS) U22.4(VS) U22.7(A0) U23.4(VS) U23.8(A1) U24.4(VS) U25.4(VS) U25.7(A0) U25.8(A1) U26.4(VS)
VCC_5V: C5.2 C44.2 R151.2 R152.2 U3.3(IN) U16.3(IN)
VCC_OUT_1: C24.1 P1.1(CENTER1) R3.2 R25.2
VCC_OUT_2: C25.1 P2.1(CENTER1) R11.2 R26.2
VCC_OUT_3: C26.1 P3.1(CENTER1) R19.2 R27.2
VCC_OUT_4: C27.2 P4.1(CENTER1) R28.2 R37.2
VCC_OUT_5: C28.2 P5.1(CENTER1) R29.2 R47.2
VCC_OUT_6: C29.2 P6.1(CENTER1) R30.2 R56.2
VCC_OUT_7: C30.2 P7.1(CENTER1) R4.2 R31.2
VCC_OUT_8: C31.2 P8.1(CENTER1) R12.2 R32.2
VCC_OUT_9: C32.2 P9.1(CENTER1) R20.2 R35.2
VCC_OUT_10: C33.2 P10.1(CENTER1) R36.2 R38.2
VCC_OUT_11: C34.2 P11.1(CENTER1) R39.2 R48.2
VCC_OUT_12: C35.2 P12.1(CENTER1) R42.2 R55.2
VCC_OUT_13: C59.2 P15.1(CENTER1) R63.2 R77.2
VCC_OUT_14: C60.2 P16.1(CENTER1) R71.2 R78.2
VCC_OUT_15: C61.2 P17.1(CENTER1) R81.2 R82.2
VCC_OUT_16: C62.2 P18.1(CENTER1) R84.2 R98.2
VCC_OUT_17: C63.2 P19.1(CENTER1) R87.2 R108.2
VCC_OUT_18: C64.2 P20.1(CENTER1) R90.2 R114.2
VCC_OUT_19: C65.2 P21.1(CENTER1) R64.2 R91.2
VCC_OUT_20: C66.2 P22.1(CENTER1) R72.2 R92.2
VCC_OUT_21: C67.2 P23.1(CENTER1) R83.2 R93.2
VCC_OUT_22: C68.2 P24.1(CENTER1) R94.2 R100.2
VCC_OUT_23: C69.2 P25.1(CENTER1) R95.2 R107.2
VCC_OUT_24: C70.2 P26.1(CENTER1) R96.2 R116.2
VCCIN1: F1.2 R1.2 R25.1
VCCIN2: F2.2 R9.2 R26.1
VCCIN3: F3.2 R17.2 R27.1
VCCIN4: F4.2 R28.1 R33.2
VCCIN5: F5.2 R29.1 R45.2
VCCIN6: F6.2 R30.1 R53.2
VCCIN7: F7.2 R2.2 R31.1
VCCIN8: F8.2 R10.2 R32.1
VCCIN9: F9.2 R18.2 R35.1
VCCIN10: F10.2 R34.2 R36.1
VCCIN11: F11.2 R39.1 R46.2
VCCIN12: F12.2 R42.1 R54.2
VCCIN13: F13.2 R61.2 R77.1
VCCIN14: F14.2 R69.2 R78.1
VCCIN15: F15.2 R79.2 R81.1
VCCIN16: F16.2 R84.1 R97.2
VCCIN17: F17.2 R87.1 R105.2
VCCIN18: F18.2 R90.1 R113.2
VCCIN19: F19.2 R62.2 R91.1
VCCIN20: F20.2 R70.2 R92.1
VCCIN21: F21.2 R80.2 R93.1
VCCIN22: F22.2 R94.1 R99.2
VCCIN23: F23.2 R95.1 R106.2
VCCIN24: F24.2 R96.1 R115.2
VCCIN_1: F1.1 F2.1 F3.1 F4.1 F5.1 F6.1 F7.1 F8.1 F9.1 F10.1 F11.1 F12.1 P13.1(CENTER1) P14.1(CENTER1) UP1.1 UP1.2 UP1.3
VCCIN_2: F13.1 F14.1 F15.1 F16.1 F17.1 F18.1 F19.1 F20.1 F21.1 F22.1 F23.1 F24.1 P27.1(CENTER1) P28.1(CENTER1) R150.1 R152.1 UP3.1 UP3.2 UP3.3
ACIN-12V: OC2.1 R145.2 R150.2 U27.2(IN)
I2C0-SCK: J1.3 R7.1 R8.1 R15.1 R16.1 R23.1 R24.1 R43.1 R44.1 R51.1 R52.1 R59.1 R60.1
I2C0-SDA: J1.4 R5.1 R6.1 R13.1 R14.1 R21.1 R22.1 R40.1 R41.1 R49.1 R50.1 R57.1 R58.1
I2C1-SCK: J1.1 R67.1 R68.1 R75.1 R76.1 R88.1 R89.1 R103.1 R104.1 R111.1 R112.1 R119.1 R120.1
I2C1-SDA: J1.2 R65.1 R66.1 R73.1 R74.1 R85.1 R86.1 R101.1 R102.1 R109.1 R110.1 R117.1 R118.1
LED_LINK1: J2.3 J26.3 R124.1
LED_LINK2: J3.3 J27.3 R123.1
LED_LINK3: J4.3 J29.3 R122.1
LED_LINK4: J5.3 J28.3 R121.1
LED_LINK5: J6.3 J30.3 R128.1
LED_LINK6: J7.3 J31.3 R127.1
LED_LINK7: J8.3 J32.3 R126.1
LED_LINK8: J9.3 J33.3 R125.1
LED_LINK9: J10.3 J34.3 R132.1
LED_LINK10: J11.3 J35.3 R131.1
LED_LINK11: J12.3 J36.3 R130.1
LED_LINK12: J13.3 J37.3 R129.1
LED_LINK13: J14.3 J38.3 R136.1
LED_LINK14: J15.3 J39.3 R134.1
LED_LINK15: J16.3 J40.3 R135.1
LED_LINK16: J17.3 J42.3 R133.1
LED_LINK17: J18.3 J41.3 R140.1
LED_LINK18: J19.3 J43.3 R138.1
LED_LINK19: J21.3 J45.3 R139.1
LED_LINK20: J20.3 J44.3 R137.1
LED_LINK21: J22.3 J46.3 R144.1
LED_LINK22: J24.3 J48.3 R142.1
LED_LINK23: J23.3 J47.3 R143.1
LED_LINK24: J25.3 J49.3 R141.1
UART1-4: J2.4 J26.4
UART1-5: J2.5 J26.5
UART2-4: J3.4 J27.4
UART2-5: J3.5 J27.5
UART3-4: J4.4 J29.4
UART3-5: J4.5 J29.5
UART4-4: J5.4 J28.4
UART4-5: J5.5 J28.5
UART5-4: J6.4 J30.4
UART5-5: J6.5 J30.5
UART6-4: J7.4 J31.4
UART6-5: J7.5 J31.5
UART7-4: J8.4 J32.4
UART7-5: J8.5 J32.5
UART8-4: J9.4 J33.4
UART8-5: J9.5 J33.5
UART9-4: J10.4 J34.4
UART9-5: J10.5 J34.5
UART10-4: J11.4 J35.4
UART10-5: J11.5 J35.5
UART11-4: J12.4 J36.4
UART11-5: J12.5 J36.5
UART12-4: J13.4 J37.4
UART12-5: J13.5 J37.5
UART13-4: J14.4 J38.4
UART13-5: J14.5 J38.5
UART14-4: J15.4 J39.4
UART14-5: J15.5 J39.5
UART15-4: J16.4 J40.4
UART15-5: J16.5 J40.5
UART16-4: J17.4 J42.4
UART16-5: J17.5 J42.5
UART17-4: J18.4 J41.4
UART17-5: J18.5 J41.5
UART18-4: J19.4 J43.4
UART18-5: J19.5 J43.5
UART19-4: J21.4 J45.4
UART19-5: J21.5 J45.5
UART20-4: J20.4 J44.4
UART20-5: J20.5 J44.5
UART21-4: J22.4 J46.4
UART21-5: J22.5 J46.5
UART22-4: J24.4 J48.4
UART22-5: J24.5 J48.5
UART23-4: J23.4 J47.4
UART23-5: J23.5 J47.5
UART24-4: J25.4 J49.4
UART24-5: J25.5 J49.5
N19276: C1.2 R1.1 U1.1(VIN+)
N19280: C1.1 R3.1 U1.2(VIN-)
N19320: R5.2 U1.6(SDA)
N19328: R7.2 U1.5(SCL)
N19941: C8.2 R9.1 U4.1(VIN+)
N19945: C8.1 R11.1 U4.2(VIN-)
N19985: R13.2 U4.6(SDA)
N19993: R15.2 U4.5(SCL)
N20630: C12.2 R17.1 U6.1(VIN+)
N20634: C12.1 R19.1 U6.2(VIN-)
N20674: R21.2 U6.6(SDA) U6.7(A0)
N20682: R23.2 U6.5(SCL)
N21343: C16.2 R33.1 U9.1(VIN+)
N21347: C16.1 R37.1 U9.2(VIN-)
N21387: R40.2 U9.6(SDA)
N21395: R43.2 U9.5(SCL) U9.7(A0)
N22080: C20.2 R45.1 U10.1(VIN+)
N22084: C20.1 R47.1 U10.2(VIN-)
N22124: R49.2 U10.6(SDA)
N22132: R51.2 U10.5(SCL)
N23999: C36.2 R53.1 U12.1(VIN+)
N24003: C36.1 R56.1 U12.2(VIN-)
N24043: R57.2 U12.6(SDA)
N24051: R59.2 U12.5(SCL)
N26775: C2.2 R2.1 U2.1(VIN+)
N26779: C2.1 R4.1 U2.2(VIN-)
N26819: R6.2 U2.6(SDA) U2.7(A0)
N26827: R8.2 U2.5(SCL)
N27051: C9.2 R10.1 U5.1(VIN+)
N27055: C9.1 R12.1 U5.2(VIN-)
N27095: R14.2 U5.6(SDA)
N27103: R16.2 U5.5(SCL) U5.7(A0)
N27327: C13.2 R18.1 U7.1(VIN+)
N27331: C13.1 R20.1 U7.2(VIN-)
N27371: R22.2 U7.6(SDA) U7.8(A1)
N27379: R24.2 U7.5(SCL)
N27603: C17.2 R34.1 U8.1(VIN+)
N27607: C17.1 R38.1 U8.2(VIN-)
N27647: R41.2 U8.6(SDA) U8.8(A1)
N27655: R44.2 U8.5(SCL)
N27879: C21.2 R46.1 U11.1(VIN+)
N27883: C21.1 R48.1 U11.2(VIN-)
N27923: R50.2 U11.6(SDA) U11.7(A0) U11.8(A1)
N27931: R52.2 U11.5(SCL)
N28155: C37.2 R54.1 U13.1(VIN+)
N28159: C37.1 R55.1 U13.2(VIN-)
N28199: R58.2 U13.6(SDA) U13.8(A1)
N28207: R60.2 U13.5(SCL) U13.7(A0)
N15950378: C40.2 R61.1 U14.1(VIN+)
N15950380: C40.1 R63.1 U14.2(VIN-)
N15950394: R65.2 U14.6(SDA)
N15950398: R67.2 U14.5(SCL)
N15950430: C47.2 R69.1 U17.1(VIN+)
N15950432: C47.1 R71.1 U17.2(VIN-)
N15950446: R73.2 U17.6(SDA)
N15950450: R75.2 U17.5(SCL)
N15950478: C51.2 R79.1 U19.1(VIN+)
N15950480: C51.1 R82.1 U19.2(VIN-)
N15950494: R85.2 U19.6(SDA) U19.7(A0)
N15950498: R88.2 U19.5(SCL)
N15950524: C55.2 R97.1 U21.1(VIN+)
N15950526: C55.1 R98.1 U21.2(VIN-)
N15950540: R101.2 U21.6(SDA)
N15950544: R103.2 U21.5(SCL) U21.7(A0)
N15950572: C71.2 R105.1 U23.1(VIN+)
N15950574: C71.1 R108.1 U23.2(VIN-)
N15950588: R109.2 U23.6(SDA)
N15950592: R111.2 U23.5(SCL)
N15950618: C75.2 R113.1 U25.1(VIN+)
N15950620: C75.1 R114.1 U25.2(VIN-)
N15950634: R117.2 U25.6(SDA)
N15950638: R119.2 U25.5(SCL)
N15950662: C41.2 R62.1 U15.1(VIN+)
N15950664: C41.1 R64.1 U15.2(VIN-)
N15950678: R66.2 U15.6(SDA) U15.7(A0)
N15950682: R68.2 U15.5(SCL)
N15950706: C48.2 R70.1 U18.1(VIN+)
N15950708: C48.1 R72.1 U18.2(VIN-)
N15950722: R74.2 U18.6(SDA)
N15950726: R76.2 U18.5(SCL) U18.7(A0)
N15950752: C52.2 R80.1 U20.1(VIN+)
N15950754: C52.1 R83.1 U20.2(VIN-)
N15950768: R86.2 U20.6(SDA) U20.8(A1)
N15950772: R89.2 U20.5(SCL)
N15950798: C56.2 R99.1 U22.1(VIN+)
N15950800: C56.1 R100.1 U22.2(VIN-)
N15950814: R102.2 U22.6(SDA) U22.8(A1)
N15950818: R104.2 U22.5(SCL)
N15950844: C72.2 R106.1 U24.1(VIN+)
N15950846: C72.1 R107.1 U24.2(VIN-)
N15950860: R110.2 U24.6(SDA) U24.7(A0) U24.8(A1)
N15950864: R112.2 U24.5(SCL)
N15950886: C76.2 R115.1 U26.1(VIN+)
N15950888: C76.1 R116.1 U26.2(VIN-)
N15950902: R118.2 U26.6(SDA) U26.8(A1)
N15950906: R120.2 U26.5(SCL) U26.7(A0)
N16778325: D16.1(ANODE) R124.2
N16778336: D13.1(ANODE) R121.2
N16778338: D14.1(ANODE) R122.2
N16778340: D15.1(ANODE) R123.2
N16779148: D20.1(ANODE) R128.2
N16779159: D17.1(ANODE) R125.2
N16779161: D18.1(ANODE) R126.2
N16779163: D19.1(ANODE) R127.2
N16779284: D24.1(ANODE) R132.2
N16779301: D23.1(ANODE) R131.2
N16779303: D22.1(ANODE) R130.2
N16779305: D21.1(ANODE) R129.2
N16779447: D28.1(ANODE) R136.2
N16779456: D27.1(ANODE) R134.2
N16779458: D26.1(ANODE) R135.2
N16779460: D25.1(ANODE) R133.2
N16780182: D32.1(ANODE) R140.2
N16780198: D31.1(ANODE) R138.2
N16780200: D30.1(ANODE) R139.2
N16780202: D29.1(ANODE) R137.2
N16780281: D36.1(ANODE) R144.2
N16780297: D35.1(ANODE) R142.2
N16780299: D34.1(ANODE) R143.2
N16780301: D33.1(ANODE) R141.2
N16803346: OC3.1 OL1.2 R146.1 R151.1
N16803354: OC1.1 OL1.1 U27.3(SW)
N16803496: OC4.2 U27.8(SS)
N16803510: R145.1 R147.1 U27.7(EN)
N16803536: R146.2 R149.1 U27.5(FB)
N16803542: OC1.2 U27.1(BST)
N168033711: OC5.2 R148.2
N168033863: R148.1 U27.6(COMP)

Pads without a net: J1 5

## Via types
v1: diameter 0.457, hole 0.254, TOP to BOTTOM, 1096 vias

## Routing (per net, layer and track width the routed paths; a pad name or vN(x,y) marks a point on that pad's centre or on a via; arc(x,y) is an arc through that point)
GND: length 2.8
  TOP w0.203: U14.7 91.98,243.29 91.97,243.28 91.9,243.28 91.72,243.11 91.72,242.82 91.91,242.64 U14.8
  vias: v1(21.34,39.98) v1(21.39,101.96) v1(21.36,100) v1(21.36,62) v1(21.39,60.1) v1(21.41,41.96) v1(21.54,166.57) v1(21.54,22.05) v1(21.51,20.12) v1(21.64,168.81) v1(21.62,119.91) v1(21.59,81.86) v1(21.59,79.83) v1(21.67,208.76) v1(21.67,149.02) v1(21.72,146.74) v1(21.77,188.75) v1(21.82,121.82) v1(22.05,101.04) v1(21.97,61.21) v1(22.23,247.78) v1(22.23,41.07) v1(22.43,207.92) v1(22.4,187.76) v1(22.35,21.18) v1(22.5,227.97) v1(22.5,121.03) v1(22.45,81) v1(22.56,167.84) v1(22.56,147.85) v1(23.11,60.78) v1(23.32,40.87) v1(23.39,247.57) v1(23.39,20.7) v1(23.55,227.28) v1(23.57,167.16) v1(23.7,207.31) v1(23.83,100.46) v1(23.93,187.53) v1(23.93,147.45) v1(23.9,7.49) v1(23.93,6.11) v1(23.93,4.82) v1(23.98,120.32) v1(23.98,3.55) v1(24.05,80.67) v1(24.23,62.26) v1(24.43,42.57) v1(24.46,22.3) v1(24.77,249.71) v1(24.84,102.31) v1(24.87,229.46) v1(24.92,209.58) v1(24.87,169.27) v1(24.94,82.5) v1(25.04,189.38) v1(25.02,149.48) v1(25.02,122.35) v1(25.53,7.49) v1(25.56,6.11) v1(25.56,4.82) v1(25.61,3.55) v1(27.13,7.52) v1(27.16,6.14) v1(27.16,4.84) v1(27.21,3.57) v1(28.8,7.52) v1(28.83,6.14) v1(28.83,4.84) v1(28.88,3.57) v1(30.38,7.52) v1(30.41,6.14) v1(30.41,4.84) v1(30.46,3.57) v1(32,7.52) v1(32.03,6.14) v1(32.03,4.84) v1(32.08,3.57) v1(32.74,272.79) v1(32.76,271.41) v1(32.76,270.11) v1(32.81,268.84) v1(33.66,7.52) v1(33.68,6.14) v1(33.68,4.84) v1(33.73,3.57) v1(34.36,272.79) v1(34.39,271.41) v1(34.39,270.11) v1(34.44,268.84) v1(35.26,7.54) v1(35.28,6.16) v1(35.28,4.87) v1(35.33,3.6) v1(35.96,272.81) v1(35.99,271.43) v1(35.99,270.14) v1(36.04,268.87) v1(36.88,7.52) v1(36.91,6.14) v1(36.91,4.84) v1(36.96,3.57) v1(37.52,262.51) v1(37.64,272.81) v1(37.64,263.78) v1(37.67,271.43) v1(37.67,270.14) v1(37.72,268.87) v1(38.84,263.98) v1(39.21,272.81) v1(39.24,271.43) v1(39.24,270.14) v1(39.29,268.87) v1(39.42,255.8) v1(40.39,254.74) v1(40.84,272.81) v1(40.87,271.43) v1(40.87,270.14) v1(40.92,268.87) v1(41.48,254.71) v1(42.49,272.81) v1(42.52,271.43) v1(42.52,270.14) v1(42.57,268.87) v1(42.75,255.37) v1(43.66,255.35) v1(44.09,272.84) v1(44.12,271.46) v1(44.12,270.16) v1(44.17,268.89) v1(44.5,255.88) v1(45.49,256.77) v1(45.71,272.81) v1(45.74,271.43) v1(45.74,270.14) v1(45.79,268.87) v1(49.56,261.87) v1(50.44,260.73) v1(50.72,262.71) v1(51.16,261.77) v1(51.18,259.38) v1(52.53,263.14) v1(52.93,258.37) v1(53.46,239.97) v1(53.49,238.59) v1(53.49,237.29) v1(53.54,236.02) v1(53.94,182.03) v1(53.94,115.08) v1(53.97,180.65) v1(53.97,179.36) v1(54.02,178.09) v1(53.97,113.7) v1(53.97,112.4) v1(54.02,111.13) v1(54.17,52.87) v1(54.2,51.49) v1(54.2,50.2) v1(54.25,48.93) v1(55.09,239.97) v1(55.12,238.59) v1(55.12,237.29) v1(55.17,236.02) v1(55.57,182.03) v1(55.6,180.65) v1(55.6,179.36) v1(55.65,178.09) v1(55.57,115.08) v1(55.6,113.7) v1(55.6,112.4) v1(55.65,111.13) v1(55.8,52.87) v1(55.83,51.49) v1(55.83,50.2) v1(55.88,48.93) v1(56.69,239.99) v1(56.72,238.61) v1(56.72,237.32) v1(56.77,236.05) v1(57.17,182.06) v1(57.2,180.68) v1(57.2,179.38) v1(57.25,178.11) v1(57.17,115.1) v1(57.2,113.72) v1(57.2,112.43) v1(57.25,111.16) v1(57.4,52.9) v1(57.43,51.52) v1(57.43,50.22) v1(57.48,48.95) v1(58.36,239.99) v1(58.39,238.61) v1(58.39,237.32) v1(58.44,236.05) v1(58.85,182.06) v1(58.85,115.1) v1(58.88,180.68) v1(58.88,179.38) v1(58.93,178.11) v1(58.88,113.72) v1(58.88,112.43) v1(58.93,111.16) v1(59.08,52.9) v1(59.1,51.52) v1(59.1,50.22) v1(59.15,48.95) v1(59.94,239.99) v1(59.97,238.61) v1(59.97,237.32) v1(60.02,236.05) v1(60.42,182.06) v1(60.42,115.1) v1(60.45,180.68) v1(60.45,179.38) v1(60.5,178.11) v1(60.45,113.72) v1(60.45,112.43) v1(60.5,111.16) v1(60.65,52.9) v1(60.68,51.52) v1(60.68,50.22) v1(60.73,48.95) v1(61.56,239.99) v1(61.59,238.61) v1(61.59,237.32) v1(61.64,236.05) v1(62.05,182.06) v1(62.05,115.1) v1(62.13,267.72) v1(62.08,180.68) v1(62.08,179.38) v1(62.13,178.11) v1(62.08,113.72) v1(62.08,112.43) v1(62.13,111.16) v1(62.18,268.73) v1(62.18,266.29) v1(62.28,52.9) v1(62.3,51.52) v1(62.3,50.22) v1(62.36,48.95) v1(62.76,257.91) v1(63.22,239.99) v1(63.24,238.61) v1(63.24,237.32) v1(63.29,236.05) v1(63.47,266.14) v1(63.7,256.9) v1(63.7,182.06) v1(63.73,180.68) v1(63.73,179.38) v1(63.7,115.1) v1(63.73,113.72) v1(63.73,112.43) v1(63.78,178.11) v1(63.78,111.16) v1(63.88,258.67) v1(63.93,52.9) v1(63.96,51.52) v1(63.96,50.22) v1(64.01,48.95) v1(64.82,240.02) v1(64.84,238.64) v1(64.84,237.34) v1(64.9,236.07) v1(65.3,182.08) v1(65.33,180.7) v1(65.33,179.41) v1(65.3,115.13) v1(65.33,113.75) v1(65.33,112.45) v1(65.38,178.14) v1(65.38,111.18) v1(65.53,52.92) v1(65.56,51.54) v1(65.56,50.25) v1(65.61,48.98) v1(66.44,239.99) v1(66.47,238.61) v1(66.47,237.32) v1(66.52,236.05) v1(66.92,182.06) v1(66.92,115.1) v1(66.95,180.68) v1(66.95,179.38) v1(67,178.11) v1(66.95,113.72) v1(66.95,112.43) v1(67,111.16) v1(67.15,52.9) v1(67.18,51.52) v1(67.18,50.22) v1(67.23,48.95) v1(69.7,262.38) v1(70.48,263.14) v1(70.87,274.5) v1(71.12,271.45) v1(72.24,274.5) v1(72.54,271.48) v1(73.38,273.66) v1(73.51,272.57) v1(74.14,7.38) v1(74.17,6) v1(74.17,4.71) v1(74.22,3.44) v1(75.76,7.38) v1(75.79,6) v1(75.79,4.71) v1(75.84,3.44) v1(77.36,7.41) v1(77.39,6.03) v1(77.39,4.73) v1(77.44,3.46) v1(79.04,7.41) v1(79.07,6.03) v1(79.07,4.73) v1(79.12,3.46) v1(80.61,7.41) v1(80.64,6.03) v1(80.64,4.73) v1(80.69,3.46) v1(82.24,7.41) v1(82.27,6.03) v1(82.27,4.73) v1(82.32,3.46) v1(83.89,7.41) v1(83.92,6.03) v1(83.92,4.73) v1(83.97,3.46) v1(85.49,7.43) v1(85.52,6.05) v1(85.52,4.76) v1(85.57,3.49) v1(87.12,7.41) v1(87.15,6.03) v1(87.15,4.73) v1(87.2,3.46) v1(91.36,264.82) v1(92.51,263.07) v1(92.68,265.79) v1(93.14,258.19) v1(93.14,257.43) v1(94.95,256.59) v1(96.49,257.4) v1(96.72,244.53) v1(96.7,204.17) v1(96.82,247.73) v1(96.93,224.43) v1(96.9,184.23) v1(96.88,117.47) v1(96.93,17.63) v1(96.95,144.32) v1(96.95,37.39) v1(97.13,164.39) v1(97.08,97.54) v1(97.1,77.44) v1(97.21,57.61) v1(97.28,227.43) v1(97.49,257.43) v1(97.51,60.78) v1(97.54,58.93) v1(97.64,246.66) v1(97.94,206.48) v1(97.89,119.81) v1(97.92,20.29) v1(98.04,99.85) v1(98.07,186.44) v1(98.15,166.32) v1(98.09,146.63) v1(98.15,79.55) v1(98.12,39.8) v1(98.32,258.01) v1(98.68,225.7) v1(98.83,205.89) v1(98.91,145.77) v1(98.96,245.67) v1(99.03,165.79) v1(99.01,79.02) v1(99.01,59.03) v1(99.14,186) v1(99.06,38.96) v1(99.11,18.77) v1(99.19,224.56) v1(99.19,119) v1(99.19,99.01) v1(99.16,19.91) v1(99.34,246.71) v1(99.29,226.92) v1(99.34,60.15) v1(99.36,204.8) v1(99.44,186.92) v1(99.44,184.84) v1(99.49,244.65) v1(99.47,206.78) v1(99.47,166.85) v1(99.49,164.87) v1(99.47,146.63) v1(99.52,144.68) v1(99.47,119.89) v1(99.47,117.91) v1(99.54,100) v1(99.49,98.04) v1(99.49,57.99) v1(99.54,39.93) v1(99.54,37.97) v1(99.54,17.75) v1(99.64,80.14) v1(99.59,78.11)
VCC_3V3_0: length 49.8
  TOP w0.254: 25.88,227.43 25.88,227.43 C23.1 ; C18.1 26.29,80.77 26.28,80.77 ; C3.1 25.65,20.76 25.67,20.75 ; C19.1 26.01,207.37 ; U2.8 28.83,151.79 v1(28.45,152.17) ; C38.1 26.31,120.27 ; 25.57,41.07 25.58,41.07 C10.1 ; C15.1 26.18,187.45 ; C39.1 25.7,247.5 25.7,247.5 ; v1(28.42,104.93) 28.7,104.65 U10.8 ; 25.42,60.81 25.4,60.83 C14.1 ; 26,167.31 26.03,167.28 C11.1 ; U12.8 27.94,124.2 27.79,124.06 v1(27.79,123.55) U12.7 ; U4.7 v1(27.06,43.9) ; U8.7 v1(27.48,210.65) ; C22.1 26.18,100.51 ; 26.26,147.37 26.26,147.38 C4.1 ; U5.8 v1(28.55,171.63)
  TOP w0.508: U8.4 26.02,207.38 25.98,207.34 v1(25.98,206.41) v1(26.47,205.92) ; U7.4 26.2,188.73 26.18,188.71 v1(26.18,186.34) 26.26,186.34 v1(26.64,185.95) ; v1(26.34,246.38) v1(25.88,246.38) 25.7,246.56 25.7,248.64 25.69,248.64 U13.4 ; U1.4 25.66,21.79 25.67,21.78 v1(25.67,19.9) v1(26.11,19.46) ; U5.4 26,168.58 26,168.58 v1(26,166.33) 26,166.05 v1(26.29,165.76) ; U4.4 25.57,42.02 25.57,42.01 25.57,40.27 v1(25.81,40.03) v1(26.26,39.57) ; v1(26.62,98.91) v1(26.18,99.35) 26.18,101.75 26.15,101.78 U10.4 ; v1(26.21,59.18) v1(25.83,59.56) 25.42,59.98 25.42,61.72 25.41,61.73 U6.4 ; U12.4 26.3,121.67 26.31,121.66 v1(26.31,119.13) v1(26.8,118.64) ; U9.4 26.28,81.77 26.28,81.76 v1(26.28,79.75) v1(26.72,79.31) ; U2.4 26.28,148.67 26.26,148.65 v1(26.26,146.18) v1(26.72,145.72) ; v1(26.31,225.63) v1(25.88,226.07) 25.88,227.43 25.9,227.45 25.9,229.24
  vias: v1(26.42,264.34) v1(26.43,262.9) v1(26.41,259.71) v1(26.48,261.38) v1(26.48,257.65) v1(26.45,255.79) v1(26.51,254.25) v1(27.58,264.34) v1(27.59,262.9) v1(27.64,261.38) v1(27.58,259.71) v1(27.62,255.79) v1(27.65,257.65) v1(27.68,254.25) v1(28.8,264.36) v1(28.81,262.93) v1(28.79,259.73) v1(28.84,255.81) v1(28.86,261.4) v1(28.87,257.67) v1(28.9,254.27) v1(30.15,264.36) v1(30.14,259.73) v1(30.16,262.93) v1(30.21,261.4) v1(30.22,257.67) v1(30.18,255.81) v1(30.24,254.27) v1(31.47,264.39) v1(31.48,262.95) v1(31.53,261.43) v1(31.46,259.76) v1(31.54,257.7) v1(31.51,255.84) v1(31.56,254.3) v1(32.87,264.36) v1(32.88,262.93) v1(32.93,261.4) v1(32.86,259.73) v1(32.94,257.67) v1(32.9,255.81) v1(32.96,254.27) v1(34.26,264.34) v1(34.27,262.9) v1(34.32,261.38) v1(34.3,255.79)
VCC_3V3_1: length 58.1
  TOP w0.203: U25.7 94.25,143.21 94.34,143.12 v1(94.34,142.9) 94.34,142.7 94.2,142.56 U25.8
  TOP w0.254: U17.7 v1(94.09,223.25) ; U18.8 v1(93.31,94.91) ; C49.1 95.66,226.29 95.66,226.29 ; C57.1 95.81,186.31 95.78,186.28 ; U22.7 v1(94.52,56.27) ; U15.8 v1(93.14,115.08) ; C73.1 95.94,166.27 95.93,166.27 ; 95.43,246.63 95.43,246.64 C42.1 ; C53.1 95.58,206.38 95.55,206.35 ; U23.8 v1(93.39,161.95)
  TOP w0.508: C43.1 95.66,119.66 95.68,119.63 95.68,118.87 95.69,118.87 U15.4 ; C43.1 95.66,120.12 v1(95.17,120.6) ; C43.1 v1(94.72,119.79) ; C78.1 95.58,20.52 v1(95.05,21.06) ; C78.1 v1(94.77,20.14) ; C78.1 95.58,20.04 95.58,20.04 95.58,19.28 95.59,19.27 U26.4 ; 95.93,166.27 95.93,165.51 95.94,165.5 U23.4 ; 95.78,186.28 95.78,185.52 95.79,185.52 U21.4 ; C50.1 95.86,99.7 95.86,99.69 95.86,98.93 95.86,98.93 U18.4 ; C50.1 v1(94.74,99.8) ; C50.1 v1(95,100.66) ; v1(95.17,147.55) 95.78,146.94 C77.1 ; C74.1 v1(94.67,39.78) ; C74.1 95.76,38.99 95.79,38.96 U24.4 ; C74.1 v1(94.97,40.56) ; C58.1 v1(95.12,60.68) ; C58.1 96.01,59.67 95.99,59.64 95.99,58.88 95.99,58.87 U22.4 ; C58.1 v1(94.77,59.79) ; v1(95.15,167.13) C73.1 v1(94.92,166.34) ; v1(95.05,227.41) 95.66,226.8 C49.1 v1(94.64,226.36) ; U14.4 95.43,245.87 95.43,245.87 95.43,246.63 ; C77.1 95.78,146.61 95.78,146.61 95.78,145.85 95.79,145.84 U25.4 ; C77.1 v1(94.87,146.74) ; U20.4 95.97,78.84 95.96,78.84 95.96,79.6 95.96,79.61 C54.1 ; v1(94.74,186.36) C57.1 95.81,186.61 v1(95.28,187.15) ; v1(95.43,247.65) C42.1 v1(94.41,246.68) ; v1(94.44,206.48) C53.1 95.58,207.24 v1(95.28,207.54) ; C54.1 95.96,79.81 v1(95.35,80.42) ; C54.1 v1(94.97,79.63) ; 95.66,226.29 95.66,225.53 95.66,225.52 U17.4 ; U19.4 95.56,205.58 95.55,205.59 95.55,206.35
  vias: v1(86.08,255.7) v1(86.1,254.56) v1(86.1,253.29) v1(86.1,252.12) v1(86.1,251.03) v1(87.1,255.68) v1(87.11,254.53) v1(87.11,253.26) v1(87.11,252.09) v1(87.11,251) v1(88.14,255.68) v1(88.16,254.53) v1(88.16,253.26) v1(88.16,252.09) v1(88.16,251) v1(89.2,255.68) v1(89.22,254.53) v1(89.22,253.26) v1(89.22,252.09) v1(89.22,251) v1(90.32,255.7) v1(90.34,254.56) v1(90.34,253.29) v1(90.34,252.12) v1(90.34,251.03) v1(91.44,255.7) v1(91.46,254.56) v1(91.46,253.29) v1(91.46,252.12) v1(91.46,251.03)
VCC_5V: length 69.7
  TOP w1.524: R152.2 94.53,264.64 94.51,264.63 ; 94.51,264.63 94.51,266.27 93.09,267.69 81.13,267.69 68.43,254.99 59.89,254.99 58.25,256.63 R151.2 51.34,256.63 47.6,260.38 42.62,260.38 42.61,260.39 U3.3 40.87,262.01 C5.2 ; 94.51,264.63 C44.2 94.48,262.43 U16.3
VCC_OUT_1: length 8.4
  TOP w0.508: R3.2 21.55,22.95 R25.2 20.13,22.12 20.14,22.11 C24.1
  TOP w1.524: P1.1 17.02,22.96 17.03,22.95 R25.2
VCC_OUT_2: length 8.5
  TOP w0.508: C25.1 19.93,42.14 19.93,42.15 R26.2 21.43,42.98 R11.2
  TOP w1.524: R26.2 17.04,42.98 17.02,42.96 P2.1
VCC_OUT_3: length 8.2
  TOP w0.508: R19.2 21.22,62.97 R27.2 19.78,62.14 19.78,62.13 C26.1
  TOP w1.524: R27.2 17.02,62.97 17.02,62.96 P3.1
VCC_OUT_4: length 8.9
  TOP w0.508: C27.2 20.08,82.12 20.08,82.13 R28.2 21.13,82.96 21.14,82.97 R37.2
  TOP w1.524: P4.1 17.02,82.96 17.02,82.96 R28.2
VCC_OUT_5: length 8.6
  TOP w0.508: C28.2 19.75,102.14 R29.2 20.97,102.97 20.98,102.96 R47.2
  TOP w1.524: P5.1 17.02,102.96 17.03,102.97 R29.2
VCC_OUT_6: length 9.1
  TOP w0.508: C29.2 20.21,122.13 20.24,122.16 R30.2 21.37,122.99 21.39,122.97 R56.2
  TOP w1.524: R30.2 17.05,122.99 17.02,122.96 P6.1
VCC_OUT_7: length 9
  TOP w0.508: R31.2 21.3,149.94 21.31,149.95 R4.2
  TOP w0.762: C30.2 20.16,148.8 20.16,148.8 R31.2
  TOP w1.524: P7.1 17.02,149.92 17.03,149.94 R31.2
VCC_OUT_8: length 8.8
  TOP w0.508: C31.2 20.19,169.07 20.19,169.07 R32.2 21.71,169.9 R12.2
  TOP w1.524: P8.1 17.02,169.92 17.03,169.9 R32.2
VCC_OUT_9: length 9
  TOP w0.508: R20.2 21.29,189.9 21.28,189.89 R35.2 20.24,189.06 20.24,189.06 C32.2
  TOP w1.524: P9.1 17.02,189.92 17.04,189.89 R35.2
VCC_OUT_10: length 8.7
  TOP w0.508: R38.2 21.58,209.93 R36.2
  TOP w0.762: C33.2 20.16,208.97 20.16,208.97 R36.2
  TOP w1.524: P10.1 17.02,209.92 17.03,209.93 R36.2
VCC_OUT_11: length 8.6
  TOP w0.508: R39.2 21.65,229.92 R48.2
  TOP w1.016: C34.2 20.16,229.92 R39.2
  TOP w1.524: R39.2 17.02,229.92 17.02,229.92 P11.1
VCC_OUT_12: length 8.5
  TOP w0.508: R55.2 21.37,249.91 R42.2 19.86,248.57 19.86,248.56 C35.2
  TOP w1.524: R42.2 18.32,249.91 18.31,249.92 17.02,249.92 17.02,249.92 P12.1
VCC_OUT_13: length 8.2
  TOP w0.508: C59.2 101.37,244.83 101.37,244.83 R77.2 101.36,243.87 R63.2
  TOP w1.524: P15.1 104.38,243.86 104.36,243.88 R77.2
VCC_OUT_14: length 8.2
  TOP w0.508: R71.2 101.41,223.85 R78.2 101.42,224.79 101.45,224.82 C60.2
  TOP w1.524: P16.1 104.38,223.86 104.38,223.86 R78.2
VCC_OUT_15: length 8.5
  TOP w0.508: R82.2 101.31,203.86 R81.2 101.32,205.01 101.34,205.03 C61.2
  TOP w1.524: R81.2 104.37,203.87 104.38,203.86 P17.1
VCC_OUT_16: length 8.4
  TOP w0.508: R98.2 101.49,183.87 R84.2 101.5,185.09 101.52,185.12 C62.2
  TOP w1.524: R84.2 104.36,183.88 104.38,183.86 P18.1
VCC_OUT_17: length 8.4
  TOP w0.508: R108.2 101.38,163.88 R87.2 101.4,165.07 101.4,165.08 C63.2
  TOP w1.524: P19.1 104.38,163.86 104.37,163.87 R87.2
VCC_OUT_18: length 8.3
  TOP w0.508: R114.2 101.34,143.87 R90.2 101.35,144.93 101.34,144.93 C64.2
  TOP w1.524: R90.2 104.36,143.88 104.38,143.86 P20.1
VCC_OUT_19: length 8.5
  TOP w0.508: C65.2 101.47,118.21 R91.2 101.46,116.92 R64.2
  TOP w1.524: P21.1 104.43,116.92 104.43,116.93 R91.2
VCC_OUT_20: length 8.4
  TOP w0.508: R72.2 101.46,96.93 R92.2 101.47,98.2 101.47,98.2 C66.2
  TOP w1.524: R92.2 104.42,96.94 104.43,96.92 P22.1
VCC_OUT_21: length 8.5
  TOP w0.508: C67.2 101.47,78.23 101.45,78.21 R93.2 101.43,76.94 R83.2
  TOP w1.524: P23.1 104.43,76.92 104.43,76.92 R93.2
VCC_OUT_22: length 8.6
  TOP w0.508: R100.2 101.39,56.95 R94.2 101.4,58.27 C68.2
  TOP w1.524: P24.1 104.43,56.92 104.4,56.96 R94.2
VCC_OUT_23: length 8.4
  TOP w0.508: R107.2 101.46,36.93 R95.2 101.47,37.77 101.5,37.8 C69.2
  TOP w1.524: R95.2 104.41,36.94 104.43,36.92 P25.1
VCC_OUT_24: length 8.4
  TOP w0.508: C70.2 101.45,17.76 101.45,17.76 R96.2 101.44,16.92 R116.2
  TOP w1.524: R96.2 104.43,16.93 104.43,16.92 P26.1
VCCIN1: length 3.2
  TOP w0.508: R25.1 21.52,24.85 R1.2
  TOP w1.524: F1.2 R25.1
VCCIN2: length 3.4
  TOP w0.508: R9.2 21.43,44.88 R26.1
  TOP w1.524: F2.2 R26.1
VCCIN3: length 3.1
  TOP w0.508: R27.1 21.22,64.87 R17.2
  TOP w1.524: F3.2 R27.1
VCCIN4: length 3.5
  TOP w0.508: R33.2 21.14,84.85 21.13,84.86 R28.1
  TOP w1.524: F4.2 R28.1
VCCIN5: length 3.8
  TOP w0.508: R45.2 20.96,104.86 20.95,104.87 R29.1
  TOP w1.524: F5.2 R29.1
VCCIN6: length 3.6
  TOP w0.508: R53.2 21.42,124.88 21.41,124.89 R30.1
  TOP w1.524: R30.1 20.24,124.89 F6.2
VCCIN7: length 3.8
  TOP w0.508: R2.2 21.31,151.83 21.3,151.84 R31.1
  TOP w1.524: F7.2 20.13,151.86 R31.1
VCCIN8: length 3.8
  TOP w0.508: R32.1 21.7,171.8 R10.2
  TOP w1.524: F8.2 R32.1
VCCIN9: length 3.7
  TOP w0.508: R18.2 21.86,191.79 R35.1
  TOP w1.524: F9.2 R35.1
VCCIN10: length 3.2
  TOP w0.508: R34.2 21.6,211.83 R36.1
  TOP w1.524: F10.2 R36.1
VCCIN11: length 3.4
  TOP w0.508: R39.1 21.68,231.82 R46.2
  TOP w1.524: R39.1 F11.2
VCCIN12: length 3.3
  TOP w0.508: R42.1 21.37,251.81 R54.2
  TOP w1.524: F12.2 R42.1
VCCIN13: length 3.1
  TOP w0.508: R61.2 101.36,241.99 R77.1
  TOP w1.524: F13.2 R77.1
VCCIN14: length 3.5
  TOP w0.508: R78.1 101.41,221.97 R69.2
  TOP w1.524: F14.2 R78.1
VCCIN15: length 3.4
  TOP w0.508: R81.1 101.31,201.98 R79.2
  TOP w1.524: F15.2 R81.1
VCCIN16: length 3.2
  TOP w0.508: R97.2 101.49,181.99 R84.1
  TOP w1.524: F16.2 R84.1
VCCIN17: length 3.2
  TOP w0.508: R87.1 101.39,161.98 R105.2
  TOP w1.524: F17.2 R87.1
VCCIN18: length 3.3
  TOP w0.508: R90.1 101.34,141.99 R113.2
  TOP w1.524: F18.2 R90.1
VCCIN19: length 3.4
  TOP w0.508: R91.1 101.46,115.04 R62.2
  TOP w1.524: F19.2 R91.1
VCCIN20: length 3.2
  TOP w0.508: R92.1 101.46,95.02 R70.2
  TOP w1.524: F20.2 R92.1
VCCIN21: length 3.2
  TOP w0.508: R80.2 101.43,75.01 R93.1
  TOP w1.524: F21.2 R93.1
VCCIN22: length 3.1
  TOP w0.508: R94.1 101.39,55.07 R99.2
  TOP w1.524: F22.2 R94.1
VCCIN23: length 3.4
  TOP w0.508: R106.2 101.46,35.05 R95.1
  TOP w1.524: F23.2 101.5,35.02 R95.1
VCCIN24: length 3.2
  TOP w0.508: R96.1 101.44,15.04 R115.2
  TOP w1.524: F24.2 R96.1
VCCIN_1:
  vias: v1(16.74,73.54) v1(16.78,260.66) v1(16.8,259.76) v1(16.8,258.8) v1(16.8,257.81) v1(16.81,220.81) v1(16.82,219.91) v1(16.82,218.95) v1(16.82,217.96) v1(16.79,113.9) v1(16.81,113) v1(16.81,112.04) v1(16.81,111.05) v1(16.76,72.64) v1(16.76,71.68) v1(16.76,70.69) v1(16.93,201.02) v1(17.01,240.72) v1(17.03,239.82) v1(17.03,238.86) v1(17.03,237.87) v1(16.95,200.12) v1(16.95,199.16) v1(16.95,198.17) v1(16.97,93.69) v1(16.99,92.79) v1(16.99,91.82) v1(16.99,90.83) v1(17.06,181.16) v1(17.08,180.26) v1(17.08,179.3) v1(17.08,178.31) v1(17.1,160.92) v1(17.11,160.02) v1(17.11,159.05) v1(17.11,158.06) v1(17.08,53.98) v1(17.1,53.08) v1(17.1,52.12) v1(17.1,51.13) v1(17.12,33.83) v1(17.14,32.93) v1(17.14,31.97) v1(17.14,30.98) v1(17.16,133.8) v1(17.18,132.9) v1(17.18,131.94) v1(17.18,130.95) v1(17.27,256.96) v1(17.27,255.97) v1(17.34,110.08) v1(17.34,109.17) v1(17.29,69.72) v1(17.29,68.8) v1(17.47,217.01) v1(17.47,216.02) v1(17.55,197.22) v1(17.55,196.23) v1(17.51,89.86) v1(17.51,88.95) v1(17.55,236.9) v1(17.55,235.99) v1(17.64,157.09) v1(17.64,156.18) v1(17.67,177.44) v1(17.67,176.44) v1(17.7,129.98) v1(17.7,129.07) v1(17.85,260.64) v1(17.81,73.52) v1(17.83,72.62) v1(17.83,71.65) v1(17.83,70.66) v1(17.87,259.74) v1(17.87,258.77) v1(17.87,257.78) v1(17.87,220.79) v1(17.89,219.89) v1(17.89,218.92) v1(17.89,217.93) v1(17.86,113.88) v1(17.88,112.98) v1(17.88,112.01) v1(17.88,111.02) v1(18,201) v1(18.02,200.1) v1(18.02,199.13) v1(18.02,198.14) v1(18.04,93.66) v1(18.08,240.7) v1(18.09,239.8) v1(18.09,238.83) v1(18.09,237.84) v1(18.13,181.14) v1(18.15,180.24) v1(18.15,179.27) v1(18.15,178.28) v1(18.05,92.76) v1(18.05,91.8) v1(18.05,90.8) v1(18.16,160.89) v1(18.18,159.99) v1(18.18,159.03) v1(18.18,158.04) v1(18.22,133.78) v1(18.24,132.88) v1(18.24,131.91) v1(18.24,130.92) v1(18.15,53.96) v1(18.17,53.06) v1(18.17,52.09) v1(18.17,51.1) v1(18.19,33.81) v1(18.21,32.91) v1(18.21,31.94) v1(18.21,30.95) v1(18.34,256.94) v1(18.34,255.95) v1(18.4,110.05) v1(18.4,109.14) v1(18.35,69.69) v1(18.35,68.78) v1(18.54,216.98) v1(18.54,215.99) v1(18.62,236.87) v1(18.62,235.96) v1(18.61,197.2) v1(18.61,196.21) v1(18.58,89.84) v1(18.58,88.92) v1(18.74,177.41) v1(18.74,176.42) v1(18.71,157.07) v1(18.71,156.16) v1(18.77,129.95) v1(18.77,129.04) v1(18.91,260.61) v1(18.93,259.71) v1(18.93,258.75) v1(18.93,257.76) v1(18.94,220.76) v1(18.92,113.85) v1(18.94,112.95) v1(18.94,111.99) v1(18.94,111) v1(18.87,73.49) v1(18.89,72.59) v1(18.89,71.63) v1(18.89,70.64) v1(18.96,219.86) v1(18.96,218.89) v1(18.96,217.9) v1(19.14,240.67) v1(19.07,200.97) v1(19.09,200.07) v1(19.09,199.11) v1(19.09,198.12) v1(19.1,93.63) v1(19.12,92.73) v1(19.12,91.77) v1(19.12,90.78) v1(19.16,239.77) v1(19.16,238.81) v1(19.16,237.82) v1(19.19,181.11) v1(19.21,180.21) v1(19.21,179.25) v1(19.21,178.25) v1(19.23,160.87) v1(19.25,159.97) v1(19.25,159) v1(19.25,158.01) v1(19.22,53.93) v1(19.24,53.03) v1(19.24,52.07) v1(19.24,51.08) v1(19.29,133.75) v1(19.31,132.85) v1(19.31,131.89) v1(19.31,130.9) v1(19.25,33.78) v1(19.27,32.88) v1(19.27,31.92) v1(19.27,30.93) v1(20.03,260.61) v1(20.04,113.85) v1(19.99,73.49) v1(20.01,72.59) v1(20.01,71.63) v1(20.01,70.64) v1(20.05,259.71) v1(20.05,258.75) v1(20.05,257.76) v1(20.06,220.76) v1(20.08,219.86) v1(20.08,218.89) v1(20.08,217.9) v1(20.06,112.95) v1(20.06,111.99) v1(20.06,111) v1(20.18,200.97) v1(20.2,200.07) v1(20.2,199.11) v1(20.2,198.12) v1(20.22,93.63) v1(20.24,92.73) v1(20.24,91.77) v1(20.24,90.78) v1(20.26,240.67) v1(20.28,239.77) v1(20.28,238.81) v1(20.28,237.82) v1(20.31,181.11) v1(20.33,180.21) v1(20.33,179.25) v1(20.33,178.25) v1(20.35,160.87) v1(20.34,53.93) v1(20.37,159.97) v1(20.37,159) v1(20.37,158.01) v1(20.41,133.75) v1(20.43,132.85) v1(20.43,131.89) v1(20.43,130.9) v1(20.36,53.03) v1(20.36,52.07) v1(20.36,51.08) v1(20.37,33.78) v1(20.39,32.88) v1(20.39,31.92) v1(20.39,30.93)
